# Altium PCB 701C USB Hub.PcbDoc (part 3 of 3)
Units mil, origin at the board's own origin, x right, y up, seen from the top; angles counter-clockwise.
Board outline 4055.12 x 2244.09 mil, 4 copper layers (Component Side, Ground Plane, Power Plane, Solder Side), stack 61 mil thick; 153 components, 125 nets, 650 pads, 236 vias.
Unrouted connection lines stored in the file: 211.
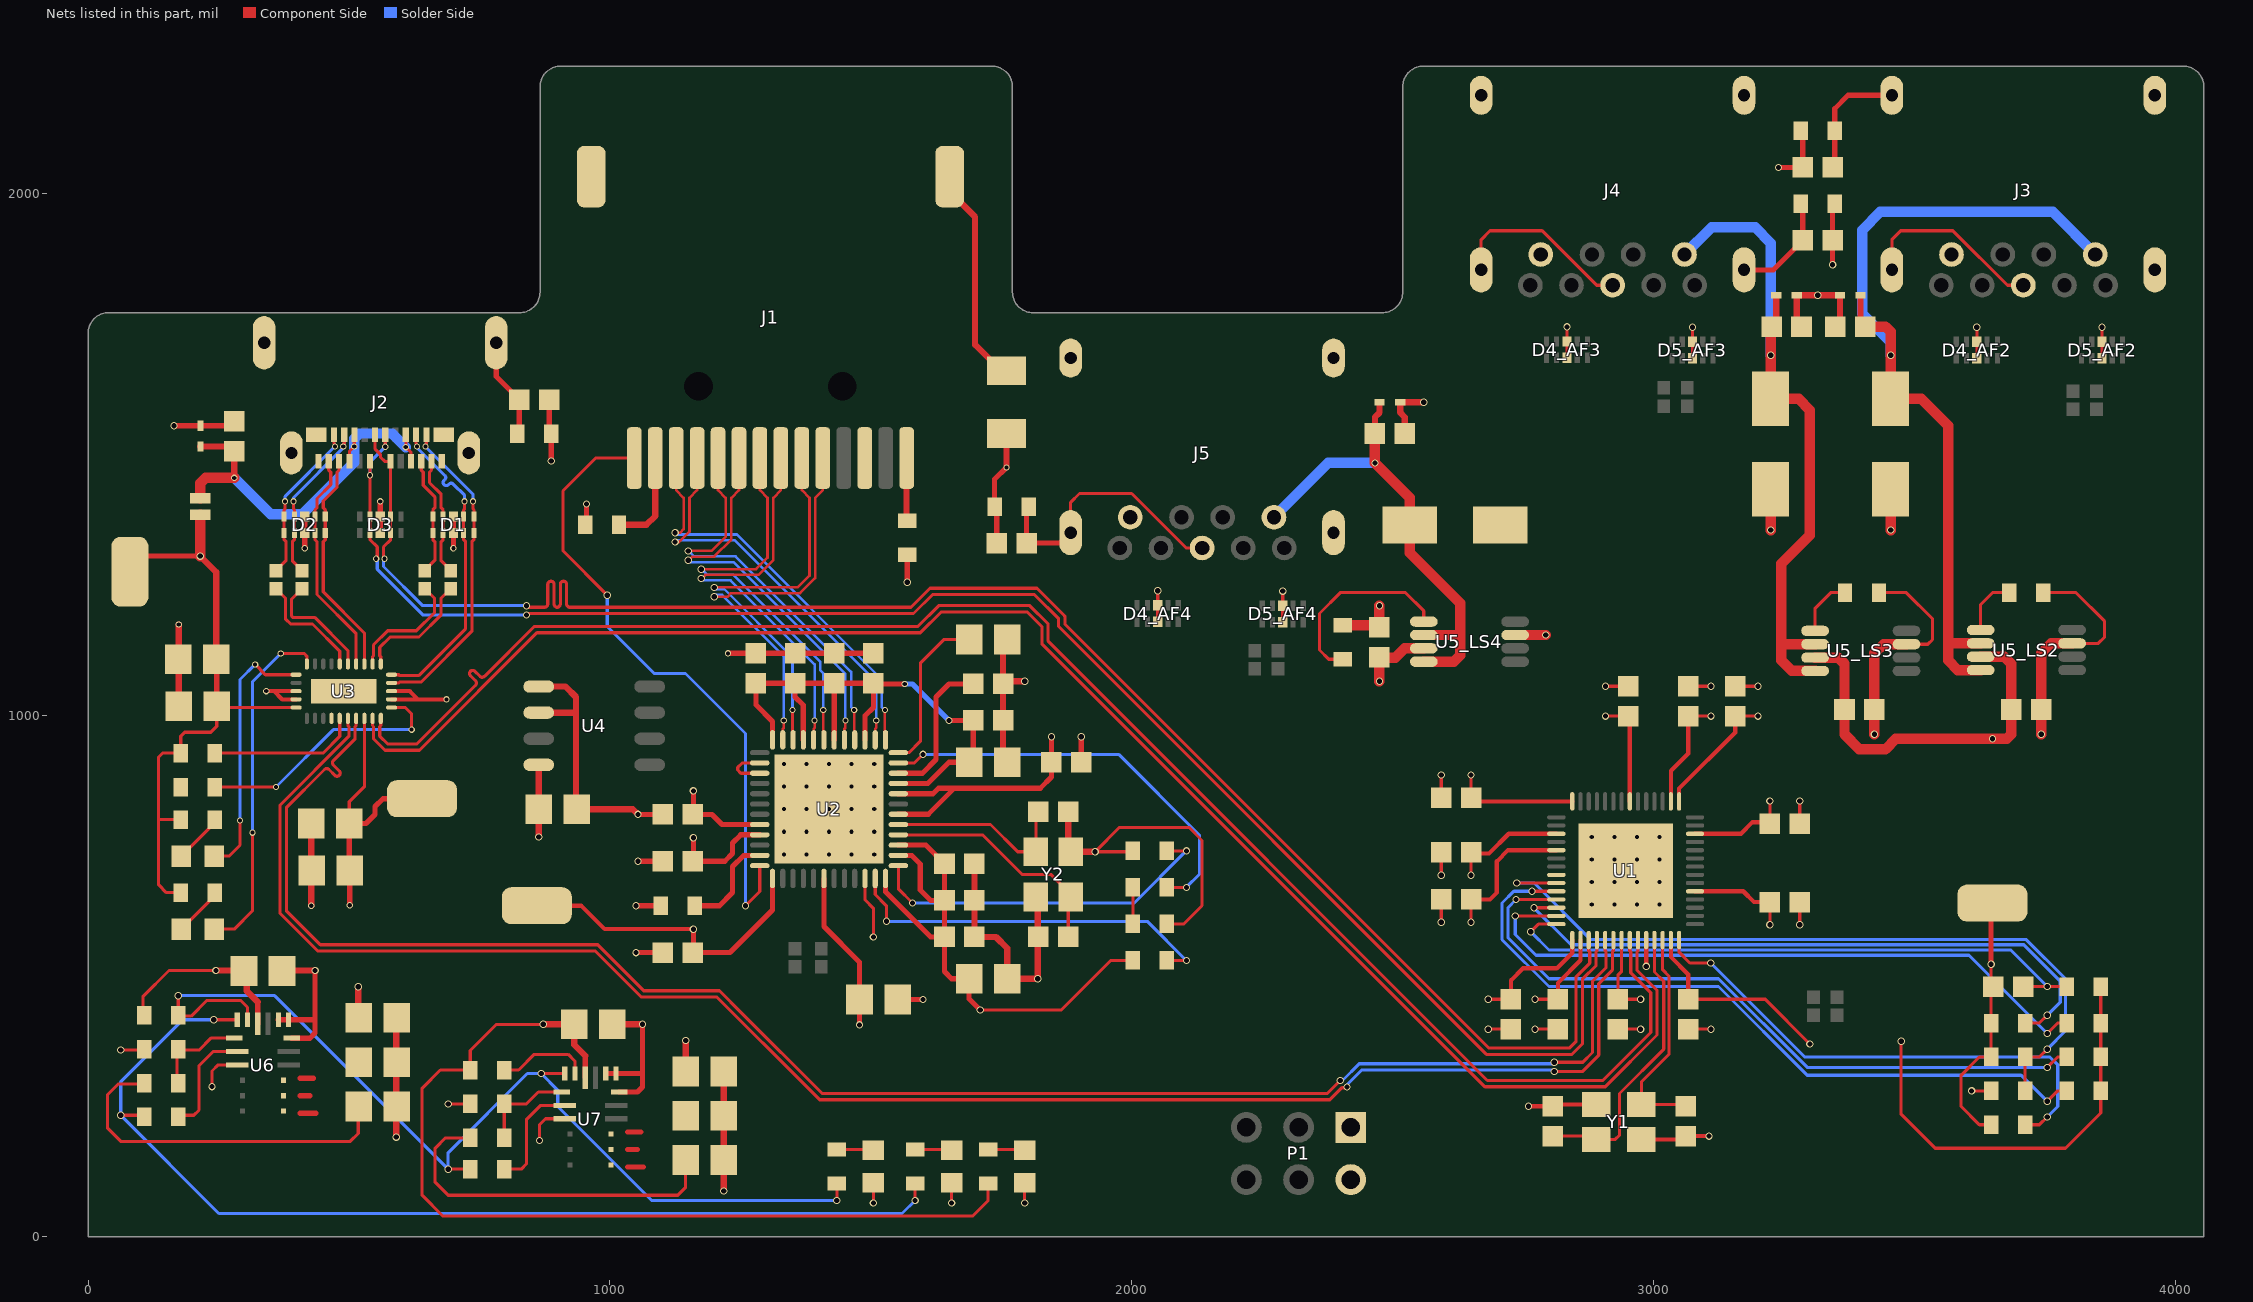
[diagram p4: the nets of this part, all layers, seen from the top]

## Via types
v1: diameter 14, hole 10, Component Side to Solder Side, 149 vias
v2: diameter 12, hole 8, Component Side to Solder Side, 46 vias
v3: diameter 19.68, hole 7.87, Component Side to Solder Side, 41 vias

## Nets (pads, with @x,y where several pads share a name; then routed paths per layer and width w, separated by ;. In a path a pad name is that pad's centre, name@x,y a point inside that pad or via, vN(x,y) a via of type N, cw(c..) or ccw(c..) an arc to the next point about the centre after c; other vN are vias at no path point) (continued)
GND: C1.2 C2.1 C3.1 C4.2 C5.2 C6.2 C7.2 C8.2 C9.2 C10.2 C11.2 C14.2 C15.2 C16.2 C17.2 C20.2 C21.2 C22.2 C23.2 C34.2 C35.2 C36_LS2.2 C36_LS3.2 C36_LS4.2 C37.2 C38.2 C39.2 C40.2 C41.2 C42.2 C43.2 C44.2 C45.2 C46.2 C47.2 C48.2 C49.2 C50.2 C51.2 C52.2 C53.2 C54.2 C57_AF2.2 C57_AF3.2 C57_AF4.2 C58.2 C59.2 C60.2 C61.2 C62.2 C63.2 C64.2 C65.2 C66.2 C67_AF2.2 C67_AF3.2 C67_AF4.2 C68.2 C71.2 C72.2 C73.2 C74.2 D1.GND D2.GND D3.GND D4_AF2.GND D4_AF3.GND D4_AF4.GND D5_AF2.GND D5_AF3.GND D5_AF4.GND D6_AF2.2 D6_AF3.2 D6_AF4.2 D7.2 D8.2 D9.2 D10.2 J1.12 J2.A1 J2.A12 J2.B1 J2.B12 J3.4 J4.4 J5.4 J9.1 P1.2 R4.1 R6.1 R7.1 R13_LS2.1 R13_LS3.1 R13_LS4.1 R16.2 R17.1 R19_AF2.1 R19_AF3.1 R19_AF4.1 R20.1 R22.1 R24.1 R25.1 R26.1 U1.52 U1.57 U2.34 U2.PAD U3.4 U3.12 U3.13 U3.28 U3.29 U3.31 U4.5 U4.6 U5_LS2.3 U5_LS3.3 U5_LS4.3 U6.3 U6.12 U6.13 U6.14 U7.3 U7.12 U7.13 U7.14 Y1.GND Y2.GND | length 8827.4
  Component Side w6: v1(62.36,358.19) R22.1@104.8,358.19 ; v1(237.36,288.19) 237.36,318.19 249.02,329.84 U6.3@285.79,329.84 ; v1(690,255) R24.1@732.44,255 ; v1(865,185) 865,215 876.65,226.65 U7.3@913.42,226.65 ; U2.34@1488.9,687.13 1488.9,646.1 1505,630 v1(1505,575) ; v1(1505,65) D10.2@1505,103.5 ; v1(1655,65) D9.2@1655,103.5 ; v1(1795,65) D8.2@1795,103.5 ; R17.1@2002.44,740 2000.75,738.31 v1(1930,738.31) 1976.69,785 2110,785 2135,760 2135,635 2100,600 R16.2@2067.56,600 ; D4_AF4.GND@2050,1179.25 D4_AF4.GND@2050,1210.75 v1(2050,1238.62) ; D5_AF4.GND@2289.68,1178.5 D5_AF4.GND@2289.68,1210 v1(2289.68,1237.87) ; v1(2593.35,603.35) C7.2@2593.35,646.97 ; v1(2593.35,693.35) C16.2@2593.35,736.97 ; C4.2@2593.35,841.97 v1(2593.35,885.59) ; v1(2683.35,398.35) C6.2@2726.97,398.35 ; v1(2773.35,398.35) C15.2@2816.97,398.35 ; D4_AF3.GND@2834.37,1685 D4_AF3.GND@2834.37,1716.5 v1(2834.37,1744.37) ; v1(2908.35,1055.59) C5.2@2951.97,1055.59 ; C8.2@2931.97,398.35 v1(2975.59,398.35) ; C17.2@3066.97,398.35 v1(3110.59,398.35) ; C14.2@3066.97,1055.59 v1(3110.59,1055.59) ; D5_AF3.GND@3075,1684.25 D5_AF3.GND@3075,1715.75 v1(3075,1743.62) ; C11.2@3156.97,1055.59 v1(3200.59,1055.59) ; v1(3280.59,598.35) C9.2@3280.59,641.97 ; C10.2@3280.59,791.97 v1(3280.59,835.59) ; R13_LS3.1@3432.56,1235 3485,1235 3535,1185 3535,1145 3526.18,1136.18 U5_LS3.3@3485.2,1136.18 ; D4_AF2.GND@3620,1684.25 D4_AF2.GND@3620,1715.75 v1(3620,1743.62) ; R6.1@3647.44,215 3625,215 3590,250 3590,310 3625,345 R7.1@3647.44,345 R4.1@3647.44,410 v1(3647.44,522.56) ; R13_LS2.1@3747.56,1235 3810,1235 3865,1180 3865,1150 3852.8,1137.8 U5_LS2.3@3802.6,1137.8 ; D5_AF2.GND@3860,1684.25 D5_AF2.GND@3860,1715.75 v1(3860,1743.62)
  Component Side w8: U3.29@398.46,1030.47 371.97,1030.47 356.22,1046.22 v2(341.22,1046.22) U3.28@398.46,1046.22 ; U3.12@581.54,1030.47 v2(686.97,1030.47) 631.97,1030.47 616.22,1046.22 U3.13@581.54,1046.22 ; v1(2760.59,250.59) C3.1@2806.97,250.59 2810.28,253.9 Y1.GND@2890.35,253.9 ; Y1.GND@2976.97,186.97 3055.59,186.97 C2.1@3061.97,193.35 v1(3106.65,193.35) ; v1(2986.34,518.66) U1.52@2986.34,569.09
  Component Side w10: v1(164.69,1554.69) D7.2@215,1554.69 271.06,1554.69 C68.2@280,1563.62 ; U6.14@364.53,416.46 U6.13@384.21,416.46 433.23,416.46 434.96,418.19 ; U6.12@390.12,381.02 425.2,381.02 434.96,390.79 434.96,418.19 ; v2(415,1320) D2.GND@415,1349.25 D2.GND@415,1380.75 ; v1(434.96,510.79) 434.96,418.19 ; D3.GND@560,1349.25 D3.GND@560,1380.75 v2(560,1410) ; v2(700,1320) D1.GND@700,1349.25 D1.GND@700,1380.75 ; C58.2@883.62,1605 883.62,1543.94 R20.1@887.56,1540 v1(887.56,1487.44) ; R26.1@952.44,1365 955,1367.56 v1(955,1405) ; U7.14@992.16,313.27 U7.13@1011.85,313.27 1060.87,313.27 1062.6,315 ; U7.12@1017.76,277.83 1052.83,277.83 1062.6,287.6 1062.6,315 ; v1(1050,545) C39.2@1101.38,545 ; v1(1053.94,720) C38.2@1101.38,720 ; v1(1053.94,810) C49.2@1101.38,810 ; v1(1062.6,407.6) 1062.6,315 ; v2(1226.38,1118.62) C42.2@1280,1118.62 C43.2@1355,1118.62 C44.2@1430,1118.62 C45.2@1505,1118.62 ; C41.2@1551.5,455 v1(1600,455) ; v1(1570,1255) R25.1@1570,1307.44 ; C57_AF4.2@1741.38,1330 1741.38,1396.06 R19_AF4.1@1737.44,1400 1737.44,1452.44 v2(1760,1475) ; C40.2@1903.62,910 v1(1903.62,958.62) ; v1(3240,2050) C57_AF2.2@3286.38,2050 3286.38,2116.06 R19_AF2.1@3282.44,2120 ; v1(3343.62,1863.62) C57_AF3.2@3343.62,1910 3343.62,1976.06 R19_AF3.1@3347.56,1980 ; v1(3647.44,522.56) 3647.44,637.44 J9.1@3650,640
  Component Side w12: C21.2@173.5,1017.44 v2(173.5,1173.94) ; C59.2@377.13,510.79 v1(434.96,510.79) ; v2(427.52,634.96) C23.2@427.52,792.44 ; v1(590.59,191.42) C60.2@590.59,420.59 ; U4.6@863.7,1005 935,1005 ; U4.5@863.7,1055 915,1055 935,1035 935,1005 ; C63.2@1004.76,407.6 v1(1062.6,407.6) ; v1(1053.94,810) 1043.94,820 C54.2@936.5,820 935,821.5 935,1005 ; v1(1218.23,88.23) C66.2@1218.23,147.4 C65.2@1218.23,232.4 C64.2@1218.23,317.4 ; C50.2@1698.62,715 C51.2@1698.62,645 C52.2@1698.62,575 1740,575 1761.5,553.5 C53.2@1761.5,495 v1(1820,495) 1820,648.23 Y2.GND@1816.54,651.69 ; v2(1760,1475) C71.2@1760,1539.88 ; C48.2@1761.5,910 1753.62,917.87 C47.2@1753.62,990 C46.2@1753.62,1060 ; C37.2@1761.5,1145 1753.62,1137.13 C46.2@1753.62,1060 ; v1(1795,1065) 1761.61,1065 1755.12,1058.5 C46.2@1753.62,1060 ; C35.2@1878.62,815 1878.62,743.15 Y2.GND@1883.46,738.31 v1(1930,738.31) ; C67_AF4.2@2523.62,1540 2523.62,1571.38 2514.69,1580.31 D6_AF4.2@2514.69,1600 v1(2560,1600) ; C67_AF3.2@3283.94,1745 3275,1753.94 D6_AF3.2@3275,1805 v1(3315,1805) D6_AF2.2@3357.76,1805 3357.76,1753.94 C67_AF2.2@3348.82,1745
  Component Side w20: R13_LS4.1@2405,1172.56 2471.06,1172.56 C36_LS4.2@2475,1168.62 v1(2475,1210) ; U5_LS4.3@2735.16,1153.8 v1(2793.8,1153.8) ; v1(3225,1355) C73.2@3225,1433.39 ; v1(3423.62,963.62) C36_LS3.2@3423.62,1011 3423.62,1118.62 3441.18,1136.18 U5_LS3.3@3485.2,1136.18 ; v1(3455,1355) C72.2@3455,1433.39 ; v1(3743.62,963.62) C36_LS2.2@3743.62,1011 3743.62,1118.62 3762.8,1137.8 U5_LS2.3@3802.6,1137.8
  other v3: 2882.01,637.01 2925.31,637.01 2968.62,637.01 3011.93,637.01 2882.01,680.32 2925.31,680.32 2968.62,680.32 3011.93,680.32 2882.01,723.62 2925.31,723.62 2968.62,723.62 3011.93,723.62 1333.39,733.39 1376.69,733.39 1420,733.39 1463.31,733.39 1506.61,733.39 2882.01,766.93 2925.31,766.93 2968.62,766.93 3011.93,766.93 1333.39,776.69 1376.69,776.69 1420,776.69 1463.31,776.69 1506.61,776.69 1333.39,820 1376.69,820 1420,820 1463.31,820 1506.61,820 1333.39,863.31 1376.69,863.31 1420,863.31 1463.31,863.31 1506.61,863.31 1333.39,906.61 1376.69,906.61 1420,906.61 1463.31,906.61 1506.61,906.61
"LINK LED2": J1.1 U2.24 | length 1269.5
  Component Side w6: v1(995,1230) 910,1315 910,1430 972.96,1492.96 J1.1@1046.65,1492.96 1045,1491.3 J1.1@1045,1450 ; v1(1260,635) 1287.13,662.13 U2.24@1287.13,711.73
  Solder Side w6: v1(995,1230) 995,1170 1085,1080 1145,1080 1260,965 v1(1260,635)
"MUX SHD": C58.1 J2.SHD R20.2 | length 193.8
  Component Side w10: J2.SHD@782.09,1713.82 782.09,1649.29 C58.1@826.38,1605 826.38,1543.94 R20.2@822.44,1540
MUX_RX_N: U1.51 U3.9 | length 3254.7
  Component Side w6: U3.9@545.12,994.06 545.12,980.23 546.99,978.35 546.99,955.03 569.02,933 634.97,933 859.97,1158 1594.97,1158 1634.97,1198 1800.03,1198 1828,1170.03 1828,1137 2677,288 2908,288 3007,387 3007,473 2968.72,511.28 2968.72,546.5 2970.59,548.38 U1.51@2970.59,569.09
MUX_RX_P: U1.50 U3.10 | length 3256.3
  Component Side w6: U3.10@560.87,994.06 560.87,980.23 558.99,978.35 558.99,960 573.99,945 630,945 742.5,1057.5 ccw(c738.26,1061.74) 742.5,1065.99 732.73,1075.76 cw(c736.97,1080) 732.73,1084.24 cw(c736.97,1080) 741.21,1084.24 750.99,1074.47 ccw(c755.23,1078.71) 759.47,1074.47 760,1075 855,1170 1590,1170 1630,1210 1805,1210 1840,1175 1840,1141.97 2681.97,300 2903.03,300 2995,391.97 2995,468.03 2956.72,506.31 2956.72,546.5 2954.84,548.38 U1.50@2954.84,569.09
MUX_TX_N: U1.48 U3.6 | length 3377.3
  Component Side w6: U3.6@497.87,994.06 497.87,980.23 499.75,978.35 499.75,959.75 368,828 368,620.03 440.03,548 972,548 1060,460 1205,460 1379,286 1402,263 2379.97,263 2402.97,286 2411.46,286 v1(2412.73,287.27) ; v1(2810,317) 2863.97,317 2895.45,348.48 2895.45,485.45 2921.47,511.47 2921.47,546.5 2923.35,548.38 U1.48@2923.35,569.09
  Solder Side w6: v1(2412.73,287.27) 2412.73,291.51 2441.21,320 2807,320 v1(2810,317)
MUX_TX_P: U1.47 U3.7 | length 3378.1
  Component Side w6: U3.7@513.62,994.06 513.62,980.23 511.75,978.35 511.75,954.78 470,913.03 ccw(c474.24,908.79) 470,904.54 481.29,893.26 cw(c477.04,889.02) 481.29,884.77 cw(c477.04,889.02) 472.8,884.77 461.51,896.06 ccw(c457.27,891.82) 453.03,896.06 450.99,894.01 380,823.03 380,625 445,560 976.97,560 1064.97,472 1209.97,472 1251.97,430 1406.97,275 2375,275 v1(2400,300) ; v1(2810,335) 2865,335 2883.45,353.45 2883.45,490.42 2909.47,516.44 2909.47,546.5 2907.6,548.38 U1.47@2907.6,569.09
  Solder Side w6: v1(2400,300) 2404.24,300 2436.24,332 2807,332 v1(2810,335)
NetC1_1: C1.1 R8.1 U1.42 | length 1172.5
  Component Side w6: v1(2765,585) 2779.61,599.61 U1.42@2814.09,599.61 ; C1.1@3708.62,480 v1(3755,480) R8.1@3792.44,480
  Solder Side w6: v1(2765,585) 2800,550 3685,550 v1(3755,480)
NetC2_2: C2.2 U1.54 Y1.1 | length 428.6
  Component Side w6: U1.54@3017.83,569.09 3017.83,512.17 3030,500 3030,350 2976.97,296.97 Y1.1@2976.97,253.9 3058.66,253.9 C2.2@3061.97,250.59
NetC3_2: C3.2 U1.53 Y1.3 | length 550.7
  Component Side w6: C3.2@2806.97,193.35 2883.98,193.35 Y1.3@2890.35,186.97 2926.97,186.97 2935,195 2935,275 3020,360 3020,490 3002.09,507.91 U1.53@3002.09,569.09
NetC34_1: C34.1 U2.40 Y2.1 | length 461.5
  Component Side w6: U2.40@1552.87,770.79 1714.21,770.79 1790,695 1845,695 1883.46,656.54 Y2.1@1883.46,651.69 1878.62,646.85 C34.1@1878.62,575
NetC35_1: C35.1 U2.41 Y2.3 | length 364
  Component Side w6: U2.41@1552.87,790.47 1729.53,790.47 1781.69,738.31 Y2.3@1816.54,738.31 1816.54,810.16 C35.1@1821.38,815
NetC37_1: C37.1 U2.48 | length 313.3
  Component Side w6: U2.48@1552.87,928.27 1573.27,928.27 1595,950 1595,1100 1640,1145 C37.1@1688.5,1145
NetC57_AF2_1: C57_AF2.1 J3.7 J3.SHD R19_AF2.2 | length 594.8
  Component Side w6: J3.SHD@3457.28,1853.59 3457.28,1911.62 3474.21,1928.55 3574.21,1928.55 3678.71,1824.06 J3.7@3709.25,1824.06
  Component Side w10: C57_AF2.1@3343.62,2050 3347.56,2053.94 R19_AF2.2@3347.56,2120 3347.56,2162.56 3373.23,2188.23 J3.SHD@3457.28,2188.23
NetC57_AF3_1: C57_AF3.1 J4.7 J4.SHD R19_AF3.2 | length 567.9
  Component Side w6: J4.SHD@2669.88,1853.59 2669.88,1911.62 2686.81,1928.55 2786.81,1928.55 2891.3,1824.06 J4.7@2921.85,1824.06
  Component Side w10: J4.SHD@3173.82,1853.59 3229.96,1853.59 C57_AF3.1@3286.38,1910 3286.38,1976.06 R19_AF3.2@3282.44,1980
NetC57_AF4_1: C57_AF4.1 J5.7 J5.SHD R19_AF4.2 | length 524.7
  Component Side w6: J5.SHD@1883.07,1350.04 1883.07,1408.07 1900,1425 2000,1425 2104.49,1320.51 J5.7@2135.04,1320.51
  Component Side w10: R19_AF4.2@1802.56,1400 1798.62,1396.06 C57_AF4.1@1798.62,1330 1863.03,1330 J5.SHD@1883.07,1350.04
NetC71_1: C71.1 J1.SHD | length 423.2
  Component Side w12: J1.SHD@1651.18,2032.33 1651.18,2003.82 1700,1955 1700,1710 1749.88,1660.12 C71.1@1760,1660.12
NetD8_1: D8.1 R31.2 | length 70.4
  Component Side w6: R31.2@1725,167.56 1793.94,167.56 D8.1@1795,166.5
NetD9_1: D9.1 R32.2 | length 70.4
  Component Side w6: R32.2@1585,167.56 1653.94,167.56 D9.1@1655,166.5
NetD10_1: D10.1 R33.2 | length 70.4
  Component Side w6: R33.2@1435,167.56 1503.94,167.56 D10.1@1505,166.5
NetD11_1: D11.1 R34.2 | length 96.5
  Component Side w6: D11.1@178.5,590 242.56,654.06 R34.2@242.56,660
NetD11_2: D11.2 U3.25 | length 670.7
  Component Side w6: D11.2@241.5,590 280,590 315,625 v2(315,775) ; v2(369.13,1118.31) 414.13,1118.31 419.13,1113.31 U3.25@419.13,1098.39
  Solder Side w6: v2(315,775) 315,1064.17 v2(369.13,1118.31)
NetD12_1: D12.1 R35.2 | length 96.5
  Component Side w6: D12.1@178.5,730 242.56,794.06 R35.2@242.56,800
NetD12_2: D12.2 U3.26 | length 503.3
  Component Side w6: D12.2@241.5,730 270,730 290.98,750.98 v2(290.98,798.43) ; v2(320,1097.44) 339.72,1077.72 U3.26@398.46,1077.72
  Solder Side w6: v2(290.98,798.43) 290.98,1068.43 v2(320,1097.44)
NetJ1_2: J1.2 R26.2 | length 187.4
  Component Side w12: R26.2@1017.56,1365 1070,1365 1086.81,1381.81 J1.2@1086.81,1492.96
NetJ1_14: J1.14 R25.2 | length 120.9
  Component Side w12: J1.14@1568.7,1492.96 1568.7,1373.86 R25.2@1570,1372.56
NetR1_2: R1.2 U1.39 | length 1339.2
  Component Side w6: v1(2736.85,646.85) U1.39@2814.09,646.85 ; v1(3755,325) 3775,345 R1.2@3792.44,345
  Solder Side w6: v1(2736.85,646.85) 2721.35,631.35 2721.35,573.65 2800,495 3125,495 3295,325 v1(3755,325)
NetR2_2: R2.2 U1.38 | length 1402.6
  Component Side w6: v1(2767.6,662.6) U1.38@2814.09,662.6 ; v1(3755,260) 3775,280 R2.2@3792.44,280
  Solder Side w6: v1(2767.6,662.6) 2732.6,662.6 2710,640 2710,570 2800,480 3125,480 3295,310 3705,310 v1(3755,260)
NetR3_2: R3.2 U1.41 | length 1258.4
  Component Side w6: v1(2735.35,615.35) U1.41@2814.09,615.35 ; v1(3755,390) 3775,410 R3.2@3792.44,410
  Solder Side w6: v1(2735.35,615.35) 2735.35,579.65 2775,540 3605,540 v1(3755,390)
NetR4_2: R4.2 U1.40 | length 1234.3
  Component Side w6: v1(2771.1,631.1) U1.40@2814.09,631.1 ; R4.2@3712.56,410 3740,410 v1(3755,425)
  Solder Side w6: v1(2771.1,631.1) 2842.2,560 3710,560 3780,490 3780,450 v1(3755,425)
NetR5_1: R5.1 R7.2 U1.37 | length 1466.5
  Component Side w6: v1(2738.35,678.35) U1.37@2814.09,678.35 ; R5.1@3712.56,280 R7.2@3712.56,345 3740,345 v1(3755,360)
  Solder Side w6: v1(2738.35,678.35) 2771.65,678.35 2880,570 3715,570 3790,495 3790,395 v1(3755,360)
NetR6_2: R6.2 U1.56 | length 995.4
  Component Side w6: U1.56@3049.33,569.09 3049.33,545.67 3070,525 v1(3110,525) ; R6.2@3712.56,215 3740,215 v1(3755,230)
  Solder Side w6: v1(3110,525) 3290,345 3760,345 3775,330 3775,250 v1(3755,230)
NetR11_1: R11.1 U3.11 | length 496.6
  Component Side w6: R11.1@242.56,862.44 v2(360,862.44) ; U3.11@581.54,1014.72 607.72,1014.72 620,1002.44 v2(620,972.44)
  Solder Side w6: v2(360,862.44) 470,972.44 v2(620,972.44)
NetR12_1: R12.1 U3.5 | length 287.4
  Component Side w6: R12.1@242.56,927.44 450,927.44 482.13,959.57 U3.5@482.13,994.06
NetR13_LS2_2: R13_LS2.2 U5_LS2.5 | length 113.4
  Component Side w6: U5_LS2.5@3627.4,1163.39 3627.4,1212.4 3650,1235 R13_LS2.2@3682.44,1235
NetR13_LS3_2: R13_LS3.2 U5_LS3.5 | length 113.1
  Component Side w6: U5_LS3.5@3310,1161.77 3310,1205 3340,1235 R13_LS3.2@3367.44,1235
NetR13_LS4_2: R13_LS4.2 U5_LS4.5 | length 373.9
  Component Side w6: R13_LS4.2@2405,1107.44 2377.56,1107.44 2360,1125 2360,1195 2400,1235 2525,1235 2559.96,1200.04 U5_LS4.5@2559.96,1179.39
NetR14_1: R14.1 U2.35 | length 734.5
  Component Side w6: U2.35@1508.58,687.13 1508.58,656.42 1530,635 v1(1530,605) ; R14.1@2067.56,530 v1(2105,530)
  Solder Side w6: v1(1530,605) 2030,605 v1(2105,530)
NetR15_1: R15.1 U2.47 | length 795.9
  Component Side w6: U2.47@1552.87,908.58 1583.58,908.58 v1(1600,925) ; R15.1@2067.56,670 v1(2105,670)
  Solder Side w6: v1(1600,925) 1975,925 2130,770 2130,695 v1(2105,670)
NetR15_2: R15.2 R16.1 | length 70
  Component Side w6: R16.1@2002.44,600 R15.2@2002.44,670
NetR17_2: R17.2 U2.37 | length 686.8
  Component Side w6: U2.37@1552.87,711.73 1552.87,667.13 v1(1580,640) ; R17.2@2067.56,740 v1(2105,740)
  Solder Side w6: v1(1580,640) 2005,640 v1(2105,740)
NetR18_1: R18.1 U2.23 | length 193.8
  Component Side w10: R18.1@1162.56,635 1210,635 1235,660 1235,710 1256.42,731.42 U2.23@1287.13,731.42
NetR21_1: R21.1 R22.2 U6.1 | length 184.4
  Component Side w6: R21.1@169.92,293.19 169.92,358.19 212.36,358.19 235.2,381.02 U6.1@279.88,381.02
NetR23_1: R23.1 R24.2 U7.1 | length 184.4
  Component Side w6: R23.1@797.56,190 R24.2@797.56,255 840,255 862.83,277.83 U7.1@907.52,277.83
NetR27_2: R27.2 R30.2 R33.1 U6.17 U7.18 | length 1948.4
  Component Side w6: R27.2@169.92,423.19 197.36,423.19 227.36,453.19 292.36,453.19 305.47,440.08 U6.17@305.47,416.46 ; R27.2@172.56,425 v1(172.56,462.56) ; v1(690,130) R30.2@732.44,130 ; v1(868.27,313.27) U7.18@913.42,313.27 ; v1(1435,70) R33.1@1435,102.44
  Solder Side w6: v1(172.56,462.56) 357.44,462.56 v1(690,130) 690,161.54 841.73,313.27 v1(868.27,313.27) 900,281.54 900,250 1080,70 v1(1435,70)
NetR28_1: R28.1 U6.2 | length 216.3
  Component Side w6: R28.1@169.92,233.19 202.36,233.19 212.36,243.19 212.36,328.19 239.61,355.43 U6.2@285.79,355.43
NetR28_2: R28.2 R32.1 U6.18 | length 2022.8
  Component Side w6: v1(62.36,233.19) R28.2@104.8,233.19 ; v1(240.63,416.46) U6.18@285.79,416.46 ; v1(1585,70) R32.1@1585,102.44
  Solder Side w6: v1(240.63,416.46) 181.46,416.46 62.36,297.36 v1(62.36,233.19) 250.55,45 1560,45 v1(1585,70)
NetR29_2: R29.2 U7.17 | length 177
  Component Side w6: R29.2@797.56,320 825,320 855,350 920,350 933.11,336.89 U7.17@933.11,313.27
NetR30_1: R30.1 U7.2 | length 216.3
  Component Side w6: R30.1@797.56,130 830,130 840,140 840,225 867.24,252.24 U7.2@913.42,252.24
NetU1_36: U1.36
TR0_N: J1.4 U2.2 | length 796.6
  Component Side w5: v1(1125,1332) 1132.56,1332 1152.55,1351.99 1152.55,1416.82 1167.13,1431.4 J1.4@1167.13,1492.96 ; U2.2@1508.58,952.87 1508.58,974.07 1510.43,975.92 v2(1510.43,990) v2@1512.93,990
  Solder Side w5: v1(1125,1332) 1128.5,1335.5 1238.94,1335.5 1510,1064.44 1510,1011.61 1510.43,1011.18 v2(1510.43,990)
TR0_P: J1.3 U2.1 | length 793.2
  Component Side w5: v1(1125,1350) 1135,1350 1141.55,1356.55 1141.55,1416.82 1126.97,1431.4 J1.3@1126.97,1492.96 ; v2(1527.17,1010) 1527.17,953.98 U2.1@1528.27,952.87
  Solder Side w5: v1(1125,1350) 1128.5,1346.5 1243.5,1346.5 1521,1069 1521,1016.17 v2(1527.17,1010)
TR1_N: J1.6 U2.5 | length 782.1
  Component Side w5: v1(1150,1297) 1151.09,1297 1158.09,1304 1199.56,1304 1232.86,1337.3 1232.86,1416.82 1247.44,1431.4 J1.6@1247.44,1492.96 ; U2.5@1449.53,952.87 1449.53,974.07 1451.37,975.92 v2(1451.37,990) v2@1453.87,990
  Solder Side w5: v1(1150,1297) 1153.5,1293.5 1236.5,1293.5 1451.37,1078.63 v2(1451.37,990)
TR1_P: J1.5 U2.4 | length 781.7
  Component Side w5: v1(1150,1315) 1195,1315 1221.86,1341.86 1221.86,1416.82 1207.28,1431.4 J1.5@1207.28,1492.96 ; v2(1468.11,1010) 1468.11,953.98 U2.4@1469.21,952.87
  Solder Side w5: v1(1150,1315) 1154.5,1310.5 1155.59,1310.5 1161.59,1304.5 1241.06,1304.5 1462.37,1083.19 1462.37,1015.74 v2(1468.11,1010)
TR2_N: J1.8 U2.8 | length 787.8
  Component Side w5: v1(1175,1262) 1176.09,1262 1183.09,1269 1284.56,1269 1313.18,1297.62 1313.18,1416.82 1327.75,1431.4 J1.8@1327.75,1492.96 ; U2.8@1390.47,952.87 1390.47,974.07 1392.31,975.92 v2(1392.31,990) v2@1394.81,990
  Solder Side w5: v1(1175,1262) 1178.5,1258.5 1231.5,1258.5 1392.31,1097.69 v2(1392.31,990)
TR2_P: J1.7 U2.7 | length 787.3
  Component Side w5: v1(1175,1280) 1280,1280 1302.18,1302.18 1302.18,1416.82 1287.6,1431.4 J1.7@1287.6,1492.96 ; v2(1409.06,1010) 1409.06,953.98 U2.7@1410.16,952.87
  Solder Side w5: v1(1175,1280) 1179.5,1275.5 1180.59,1275.5 1186.59,1269.5 1236.06,1269.5 1403.31,1102.24 1403.31,1086.03 1409.06,1080.29 v2(1409.06,1010)
TR3_N: J1.10 U2.11 | length 790.8
  Component Side w5: v1(1200,1227) 1225.49,1227 1232.49,1234 1364.56,1234 1393.49,1262.93 1393.49,1416.82 1408.07,1431.4 J1.10@1408.07,1492.96 ; U2.11@1331.42,952.87 1331.42,974.07 1333.26,975.92 v2(1333.26,990) v2@1335.76,990
  Solder Side w5: v1(1200,1227) 1203.5,1230.5 1215,1230.5 1333.26,1112.24 v2(1333.26,990)
TR3_P: J1.9 U2.10 | length 787.4
  Component Side w5: v1(1200,1245) 1360,1245 1382.49,1267.49 1382.49,1416.82 1367.91,1431.4 J1.9@1367.91,1492.96 ; v2(1350,1010) 1350,953.98 U2.10@1351.1,952.87
  Solder Side w5: v1(1200,1245) 1203.5,1241.5 1219.56,1241.5 1344.26,1116.8 1344.26,1112.24 1350,1106.5 v2(1350,1010)
UFP_D_N: D3.2 J2.A7 J2.B7 U1.46 | length 3259.9
  Component Side w6: J2.A7@539.96,1486.66 v2(539.96,1459.96) 540.32,1459.6 D3.2@540.32,1380.75 D3.2@540.32,1349.25 540.32,1336.41 554,1322.72 554,1302 v2(552,1300) ; v2(569.49,1514.49) J2.B7@569.49,1537.84 ; v1(840,1192) 843,1195 1581.97,1195 1618.49,1231.51 1813.49,1231.51 1860,1185 1860,1170 2680,350 2843.97,350 2863.97,370 2863.97,493.97 2889.98,519.98 2889.98,546.5 2891.85,548.38 U1.46@2891.85,569.09
  Solder Side w6: v2(539.96,1459.96) 539.96,1484.96 v2(569.49,1514.49) ; v2(552,1300) 554,1298 554,1280.03 642.03,1192 v1(840,1192)
UFP_D_P: D3.4 J2.A6 J2.B6 U1.45 | length 3376.7
  Component Side w6: J2.B6@549.8,1537.84 550,1537.64 550,1510 560,1500 560,1495 568.34,1486.66 J2.A6@579.33,1486.66 579.33,1469.88 579.68,1469.52 D3.4@579.68,1380.75 D3.4@579.68,1349.25 579.68,1336.41 566,1322.72 566,1302 v2(568,1300) ; v1(840,1210) 843,1207 875,1207 ccw(c875,1213) 881,1213 881,1251 cw(c887,1251) 887,1257 cw(c887,1251) 893,1251 893,1213 ccw(c899,1213) 899,1207 ccw(c899,1213) 905,1213 905,1251 cw(c911,1251) 911,1257 cw(c911,1251) 917,1251 917,1213 ccw(c923,1213) 923,1207 929,1207 930,1207 1577,1207 1610,1240 1613.51,1243.51 1818.46,1243.51 1821.97,1240 1868.49,1193.49 1872,1189.97 1872,1174.97 2684.97,362 2839,362 2851.97,374.97 2851.97,498.94 2877.98,524.95 2877.98,546.5 2876.1,548.38 U1.45@2876.1,569.09
  Solder Side w6: v2(568,1300) 566,1298 566,1285 641,1210 v1(840,1210)
UFP_RX1_N: D1.4 J2.B10 U3.15 | length 609.7
  Component Side w6: U3.15@581.54,1077.72 595.36,1077.72 597.24,1075.84 633.4,1075.84 723.53,1165.97 723.53,1332.57 719.68,1336.41 D1.4@719.68,1349.25 D1.4@719.68,1380.75 719.68,1393.59 721.53,1395.43 v2(721.53,1410) ; J2.B10@628.54,1537.84 628.54,1521.06 630.38,1519.22 v2(630.38,1515)
  Solder Side w6: v2(630.38,1515) 630.38,1512.62 684,1459 cw(c680.73,1455.73) 684,1452.46 682.14,1450.59 ccw(c686.38,1446.35) 682.14,1442.11 ccw(c686.38,1446.35) 690.62,1442.11 691.51,1443 cw(c695.76,1438.76) 700,1443 721.53,1421.47 v2(721.53,1410)
UFP_RX1_P: D1.5 J2.B11 U3.14 | length 612.7
  Component Side w6: U3.14@581.54,1061.97 595.36,1061.97 597.24,1063.84 638.37,1063.84 735.53,1161 735.53,1332.57 739.37,1336.41 D1.5@739.37,1349.25 D1.5@739.37,1380.75 739.37,1393.59 737.53,1395.43 v2(737.53,1410) ; v2(646.38,1515) 646.38,1519.22 648.23,1521.06 J2.B11@648.23,1537.84
  Solder Side w6: v2(646.38,1515) 737.53,1423.86 v2(737.53,1410)
UFP_RX2_N: D2.5 J2.A10 U3.18 | length 436.7
  Component Side w6: J2.A10@480.9,1486.66 480.9,1469.88 477.06,1466.04 477.06,1437.06 450.53,1410.53 450.53,1397.43 454.37,1393.59 D2.5@454.37,1380.75 D2.5@454.37,1349.25 454.37,1336.41 450.53,1332.57 450.53,1236.44 529.37,1157.6 U3.18@529.37,1098.39
UFP_RX2_P: D2.4 J2.A11 U3.19 | length 435.1
  Component Side w6: J2.A11@461.22,1486.66 461.22,1469.88 465.06,1466.04 465.06,1442.03 438.53,1415.5 438.53,1397.43 434.69,1393.59 D2.4@434.69,1380.75 D2.4@434.69,1349.25 434.69,1336.41 438.53,1332.57 438.53,1231.47 513.62,1156.38 U3.19@513.62,1098.39
UFP_TX1_N: C27.1 D1.1 J2.A3 | length 231.4
  Component Side w6: J2.A3@638.38,1486.66 638.38,1469.88 642.23,1466.04 642.23,1440.8 664.47,1418.56 664.47,1397.43 660.63,1393.59 D1.1@660.63,1380.75 D1.1@660.63,1349.25 660.63,1336.41 664.47,1332.57 664.47,1296.8 C27.1@645,1277.32
UFP_TX1_P: C25.1 D1.2 J2.A2 | length 231
  Component Side w6: J2.A2@658.07,1486.66 658.07,1469.88 654.23,1466.04 654.23,1445.77 676.47,1423.53 676.47,1397.43 680.32,1393.59 D1.2@680.32,1380.75 D1.2@680.32,1349.25 680.32,1336.41 676.47,1332.57 676.47,1295.85 C25.1@695,1277.32
UFP_TX1b_N: C27.2 U3.17 | length 233.6
  Component Side w6: U3.17@545.12,1098.39 545.12,1112.21 546.99,1114.09 546.99,1134.97 574.02,1162 629.02,1162 664,1196.98 664,1223.68 C27.2@645,1242.68
UFP_TX1b_P: C25.2 U3.16 | length 233.6
  Component Side w6: U3.16@560.87,1098.39 560.87,1112.21 558.99,1114.09 558.99,1130 578.99,1150 633.99,1150 676,1192.01 676,1223.68 C25.2@695,1242.68
UFP_TX2_N: C70.1 D2.2 J2.B3 | length 310.8
  Component Side w6: v2(393.47,1410) 393.47,1395.43 395.31,1393.59 D2.2@395.31,1380.75 D2.2@395.31,1349.25 395.31,1336.41 391.47,1332.57 391.47,1295.85 C70.1@410,1277.32 ; v2(488.9,1515) 488.9,1519.22 490.75,1521.06 J2.B3@490.75,1537.84
  Solder Side w6: v2(393.47,1410) 393.47,1417.18 488.9,1512.62 v2(488.9,1515)
UFP_TX2_P: C69.1 D2.1 J2.B2 | length 311.2
  Component Side w6: C69.1@360,1277.32 379.47,1296.8 379.47,1332.57 375.63,1336.41 D2.1@375.63,1349.25 D2.1@375.63,1380.75 375.63,1393.59 377.47,1395.43 v2(377.47,1410) ; J2.B2@471.06,1537.84 471.06,1521.06 472.9,1519.22 v2(472.9,1515)
  Solder Side w6: v2(377.47,1410) 377.47,1419.57 v2(472.9,1515)
UFP_TX2b_N: C70.2 U3.20 | length 221.8
  Component Side w6: C70.2@410,1242.68 390,1222.68 390,1190 393,1187 434.97,1187 497.87,1124.1 U3.20@497.87,1098.39
UFP_TX2b_P: C69.2 U3.21 | length 219.5
  Component Side w6: C69.2@360,1242.68 378,1224.68 378,1185.03 379,1184.03 388.03,1175 430,1175 482.13,1122.87 U3.21@482.13,1098.39
VBUS: C20.1 C21.1 C36_LS2.1 C36_LS3.1 C36_LS4.1 C59.1 C63.1 J6.1 J10.1 R5.2 R12.2 R27.1 R29.1 R31.1 R34.1 R35.1 U3.30 U5_LS2.7 U5_LS3.7 U5_LS4.7 U6.16 U7.16 | length 4321.7
  Component Side w6: R27.1@104.8,423.19 104.8,460.63 154.96,510.79 v1(244.76,510.79) ; R34.1@177.44,660 150,660 135,675 135,800 ; R35.1@177.44,800 135,800 ; U3.30@398.46,1014.72 249.21,1014.72 C21.1@246.5,1017.44 246.5,978.94 235,967.44 185,967.44 177.44,959.88 R12.2@177.44,927.44 142.44,927.44 135,920 135,800 ; v1(872.4,407.6) 782.6,407.6 732.44,357.44 R29.1@732.44,320 675,320 640,285 640,80 680,40 1695,40 1725,70 R31.1@1725,102.44 ; v1(3610,280) R5.2@3647.44,280
  Component Side w10: J6.1@80,1275 110,1305 v1(215,1305) ; C20.1@245.51,1107.44 246.5,1106.46 C21.1@246.5,1017.44 ; U6.16@325.16,408.58 325.16,450.39 ; U7.16@952.79,305.39 952.79,347.21
  Component Side w12: v1(215,1305) 245.51,1274.49 C20.1@245.51,1107.44 ; v1(244.76,510.79) 304.13,510.79 304.13,471.42 325.16,450.39 ; v1(872.4,407.6) C63.1@931.77,407.6 931.77,368.23 952.79,347.21
  Component Side w20: v1(215,1305) J10.1@215,1384.25 ; v1(2475,1065) C36_LS4.1@2475,1111.38 2476.38,1110 2505,1110 2523.2,1128.2 U5_LS4.7@2559.96,1128.2 ; U5_LS3.7@3310,1110.59 3354.41,1110.59 3366.38,1098.62 C36_LS3.1@3366.38,1011 3366.38,963.62 3395,935 3445,935 3465,955 v1(3650,955) 3677.76,955 3686.38,963.62 C36_LS2.1@3686.38,1011 3686.38,1098.62 3672.8,1112.2 U5_LS2.7@3627.4,1112.2
VBUS2: C67_AF2.1 C72.1 D6_AF2.1 J3.1 U5_LS2.6 U5_LS2.8 | length 1718.1
  Component Side w12: D6_AF2.1@3397.13,1805 3397.13,1753.94 C67_AF2.1@3406.06,1745
  Component Side w20: C67_AF2.1@3406.06,1745 3445,1745 3455,1735 v1(3455,1690) C72.1@3455,1606.61 3513.39,1606.61 3565,1555 3565,1140 ; U5_LS2.8@3627.4,1086.61 3583.39,1086.61 3565,1105 3565,1140 ; U5_LS2.6@3627.4,1137.8 3567.2,1137.8 3565,1140
  Solder Side w20: v1(3455,1690) 3455,1715 3400,1770 3400,1930 3435,1965 3765.16,1965 J3.1@3847.05,1883.11
VBUS3: C67_AF3.1 C73.1 D6_AF3.1 J4.1 U5_LS3.6 U5_LS3.8 | length 1342.6
  Component Side w12: C67_AF3.1@3225,1743.31 C67_AF3.1@3226.69,1745 3235.63,1753.94 D6_AF3.1@3235.63,1805
  Component Side w20: C67_AF3.1@3225,1743.31 v1(3225,1690) C73.1@3225,1606.61 3278.39,1606.61 3300,1585 3300,1345 3245,1290 3245,1135 ; U5_LS3.8@3310,1085 3265,1085 3245,1105 3245,1135 ; U5_LS3.6@3310,1136.18 3246.18,1136.18 3245,1135
  Solder Side w20: J4.1@3059.64,1883.11 3111.53,1935 3195,1935 3225,1905 v1(3225,1690)
VBUS4: C67_AF4.1 C74.1 D6_AF4.1 J5.1 U5_LS4.6 U5_LS4.8 | length 938.8
  Component Side w12: C67_AF4.1@2466.38,1540 2466.38,1571.38 2475.32,1580.31 D6_AF4.1@2475.32,1600
  Component Side w20: C67_AF4.1@2466.38,1540 v1(2466.38,1483.62) 2485,1465 2505,1445 2533.39,1416.61 C74.1@2533.39,1365 2533.39,1311.61 2630,1215 2630,1155 ; U5_LS4.8@2559.96,1102.61 2617.61,1102.61 2630,1115 2630,1155 ; U5_LS4.6@2559.96,1153.8 2628.8,1153.8 2630,1155
  Solder Side w20: J5.1@2272.83,1379.56 2376.89,1483.62 v1(2466.38,1483.62)
"VBUS IN": C68.1 D7.1 J2.A4 J2.A9 J2.B4 J2.B9 J10.2 | length 788.2
  Component Side w6: J2.A9@500.59,1486.66 500.59,1505.59 v2(510,1515) 510,1537.41 J2.B4@510.43,1537.84 ; J2.B9@608.86,1537.84 v2(608.86,1513.86) 618.7,1504.01 J2.A4@618.7,1486.66
  Component Side w12: D7.1@215,1515.32 271.06,1515.32 C68.1@280,1506.38 v2(280,1455)
  Component Side w20: J10.2@215,1415.75 215,1445 225,1455 v2(280,1455)
  Solder Side w20: v2(280,1455) 350,1385 410,1385 510,1485 v2(510,1515) 510,1530 520,1540 582.71,1540 v2(608.86,1513.86)
VDD12: C4.1 C5.1 C6.1 C7.1 C8.1 C9.1 C10.1 C11.1 C38.1 C39.1 C40.1 C41.1 C64.1 C65.1 C66.1 J8.1 R23.2 U1.5 U1.12 U1.15 U1.21 U1.28 U1.33 U1.43 U1.49 U2.21 U2.25 U2.30 U2.42 U2.44 U7.7 U7.8 U7.9 | length 4222.7
  Component Side w6: R23.2@732.44,190 685,190 665,170 665,105 690,80 1130,80 1145.24,95.24 C66.1@1145.24,147.4 ; C38.1@1160,721.38 C38.1@1161.38,720 ; v1(2650.59,603.35) C7.1@2650.59,646.97 ; C4.1@2650.59,841.97 v1(2650.59,885.59) ; v1(2683.35,455.59) C6.1@2726.97,455.59 ; v1(2908.35,998.35) C5.1@2951.97,998.35 ; U1.49@2939.09,569.09 2939.09,509.09 2931.97,501.97 C8.1@2931.97,455.59 v1(2975.59,455.59) ; C11.1@3156.97,998.35 v1(3200.59,998.35) ; v1(3223.35,598.35) C9.1@3223.35,641.97 ; C10.1@3223.35,791.97 v1(3223.35,835.59)
  Component Side w8: J8.1@860,635 945,635 990,590 v1(1160,590) ; C7.1@2650.59,646.97 2686.97,646.97 2700,660 2700,720 2721.34,741.34 U1.33@2814.09,741.34 ; C4.1@2650.59,841.97 2657.72,834.84 U1.28@2844.61,834.84 ; C6.1@2726.97,455.59 2726.97,491.97 2750,515 2815,515 2844.61,544.61 U1.43@2844.61,569.09 ; C5.1@2951.97,998.35 2954.84,995.47 U1.21@2954.84,834.84 ; U1.15@3049.33,834.84 3049.33,859.33 3156.97,966.97 C11.1@3156.97,998.35 ; U1.5@3079.84,662.6 3172.4,662.6 3193.03,641.97 C9.1@3223.35,641.97 ; U1.12@3079.84,772.83 3167.83,772.83 3190,795 3220.32,795 C10.1@3223.35,791.97
  Component Side w10: 1033.5,134.13 1064.13,134.13 ; 1033.5,167.6 1052.6,167.6 ; 1033.5,201.06 1058.94,201.06 ; C39.1@1158.62,545 1230,545 1311.73,626.73 U2.25@1311.73,687.13 ; C39.1@1160,546.38 v1(1160,590) ; C38.1@1160,721.38 v1(1160,765) ; C38.1@1161.38,720 1220,720 1235,735 1235,755 1250.79,770.79 U2.21@1287.13,770.79 ; U2.30@1410.16,687.13 1410.16,594.84 1478.5,526.5 C41.1@1478.5,470 ; v1(1478.5,406.5) C41.1@1478.5,455 ; U2.42@1552.87,810.16 1610.16,810.16 1660,860 ; U2.44@1552.87,849.53 1619.53,849.53 1630,860 1660,860 ; v1(1846.38,958.62) C40.1@1846.38,910 1846.38,881.38 1825,860 1660,860
  Component Side w12: C64.1@1145.24,317.4 v1(1145.24,376.57)
VDD12_DISABLE: U2.14 U2.15 | length 95.3
  Component Side w6: U2.15@1287.13,888.9 1251.1,888.9 1245,895 1245,900 1253.58,908.58 U2.14@1287.13,908.58
VDD25: C42.1 C43.1 C44.1 C45.1 C47.1 C48.1 U2.3 U2.6 U2.9 U2.12 U2.45 | length 1142.2
  Component Side w10: U2.12@1311.73,952.87 1311.73,988.27 1280,1020 C42.1@1280,1061.38 C43.1@1355,1061.38 ; U2.9@1370.79,952.87 1370.79,1019.21 1355,1035 C43.1@1355,1061.38 ; U2.6@1429.84,952.87 1429.84,1061.22 C44.1@1430,1061.38 ; U2.3@1488.9,952.87 1488.9,998.9 1505,1015 C45.1@1505,1061.38 ; U2.45@1552.87,869.21 1609.21,869.21 1650,910 C48.1@1688.5,910 1696.38,917.87 C47.1@1696.38,990 v1(1650,990) ; v2(1565,1060) 1506.38,1060 C45.1@1505,1061.38 ; C43.1@1355,1061.38 C44.1@1430,1061.38 ; C44.1@1430,1061.38 C45.1@1505,1061.38
  Solder Side w10: v2(1565,1060) 1580,1060 v1(1650,990)
VDD33: C14.1 C15.1 C16.1 C17.1 C22.1 C23.1 C46.1 C49.1 C50.1 C51.1 C52.1 C53.1 C54.1 C60.1 C61.1 C62.1 J7.1 P1.1 R1.1 R2.1 R3.1 R8.2 R11.2 R14.2 R18.2 R21.2 U1.16 U1.31 U1.44 U1.55 U2.20 U2.36 U2.38 U2.39 U2.46 U3.8 U4.8 U6.7 U6.8 U6.9 | length 4939.4
  Component Side w6: R21.2@104.8,293.19 57.36,293.19 37.36,273.19 37.36,208.19 62.36,183.19 502.36,183.19 517.6,198.43 C62.1@517.6,250.59 ; C23.1@500.51,792.44 500.51,834.21 529.37,863.07 U3.8@529.37,994.06 ; C49.1@1160,811.38 C49.1@1161.38,810 ; v1(1710,435) 1865,435 1960,530 R14.2@2002.44,530 ; v1(2650.59,693.35) C16.1@2650.59,736.97 ; v1(2773.35,455.59) C15.1@2816.97,455.59 ; C17.1@3066.97,455.59 3214.41,455.59 v1(3300,370) ; C14.1@3066.97,998.35 v1(3110.59,998.35) ; v1(3475,375) 3475,235 3540,170 3790,170 3857.56,237.56 R8.2@3857.56,480
  Component Side w8: C16.1@2650.59,736.97 2652.56,735 2685,735 2722.83,772.83 U1.31@2814.09,772.83 ; C15.1@2816.97,455.59 2816.97,486.97 2860.35,530.35 U1.44@2860.35,569.09 ; U1.55@3033.58,569.09 3033.58,536.42 3066.97,503.03 C17.1@3066.97,455.59 ; U1.16@3033.58,834.84 3033.58,893.58 3066.97,926.97 C14.1@3066.97,998.35
  Component Side w10: 405.87,237.32 436.5,237.32 ; 405.87,270.79 424.96,270.79 ; 405.87,304.25 431.3,304.25 ; v2(501.5,635.94) C22.1@501.5,702.44 500.51,703.43 C23.1@500.51,792.44 532.44,792.44 550,810 550,825 565,840 J7.1@640,840 ; v1(1050,635) R18.2@1097.44,635 ; C49.1@1160,811.38 v1(1160,855) ; C49.1@1161.38,810 1195.47,810 1215,790.47 U2.20@1287.13,790.47 ; U2.36@1528.27,687.13 1528.27,661.73 1615,575 C52.1@1641.38,575 ; U2.38@1552.87,731.42 1578.58,731.42 1595,715 1595,665 1615,645 C51.1@1641.38,645 ; U2.39@1552.87,751.1 1605.28,751.1 C50.1@1641.38,715 C51.1@1641.38,645 ; U2.46@1552.87,888.9 1598.9,888.9 1625,915 1625,1035 1650,1060 C46.1@1696.38,1060 ; v1(1710,435) 1688.5,456.5 C53.1@1688.5,495 1655,495 1641.38,508.62 C52.1@1641.38,575 ; C52.1@1641.38,575 C51.1@1641.38,645
  Component Side w12: C60.1@517.6,420.59 v1(517.6,479.76) ; v1(863.5,766.5) C54.1@863.5,820 863.7,820.2 U4.8@863.7,905
pads on no net: D4_AF2.4 D4_AF2.5 D4_AF3.4 D4_AF3.5 D4_AF4.4 D4_AF4.5 J1.11 J1.16 J1.17 J2.A8 J2.B8 U2.13 U2.22 U2.43 U3.3 U3.22 U3.23 U3.24 U3.27 U4.7 U5_LS2.4 U5_LS3.4 U5_LS4.4 U6.4 U6.5 U6.6 U6.10 U6.11 U6.15 U7.4 U7.5 U7.6 U7.10 U7.11 U7.15

## Polygon pours and split planes (outlines as drawn)
VDD33 on Component Side "Component Side-VDD12" (solid, pour order 4): 417.36,313.19 417.36,232.4 433.15,232.4 442.36,223.19 527.36,223.19 527.36,448.19 452.36,448.19 452.36,348.19
VDD12 on Component Side "Component Side-VDD12" (solid, pour order 0): 1045,210 1045,129.21 1060.79,129.21 1070,120 1155,120 1155,345 1080,345 1080,245
VDD33 on Power Plane (split plane): 1737.91,2223.26 1741.41,2221.8 1744.57,2219.7 1747.25,2217.01 1749.36,2213.85 1750.82,2210.35 1751.56,2206.62 1751.56,2204.72 1751.56,1811.02 1751.61,1810.53 1751.58,1810.04 1751.77,1806.18 1751.99,1804.72 1752.13,1803.24 1753.64,1795.67 1754.78,1791.9 1757.74,1784.77 1758.6,1783.16 1759.59,1781.3 1763.88,1774.88 1764.86,1773.69 1766.38,1771.84 1771.84,1766.38 1773.81,1764.76 1774.88,1763.88 1781.3,1759.59 1783.16,1758.6 1784.77,1757.74 1791.9,1754.78 1795.67,1753.64 1803.24,1752.13 1804.72,1751.99 1806.18,1751.77 1810.04,1751.58 1810.53,1751.61 1811.02,1751.56 1817.44,1751.56 1817.44,1607.56 968.13,1607.56 864.77,1710.93 864.77,1765.4 865.96,1766.38 871.42,1771.84 873.03,1773.81 873.91,1774.88 878.2,1781.3 879.2,1783.16 880.06,1784.77 883.01,1791.9 884.16,1795.67 885.66,1803.24 885.81,1804.71 886.02,1806.18 886.21,1810.04 886.19,1810.53 886.24,1811.02 886.24,2204.72 886.24,2206.62 886.98,2210.35 888.43,2213.85 890.54,2217.01 893.23,2219.7 896.38,2221.8 899.89,2223.26 903.61,2224 979.51,2224 979.51,1835.23 979.51,1835.17 979.51,1835.11 979.53,1831.23 979.94,1827.31 981.5,1819.71 982.13,1817.69 982.67,1815.95 985.68,1808.81 987.56,1805.34 991.91,1798.92 993.58,1796.91 994.43,1795.89 999.95,1790.44 1002.29,1788.54 1003.01,1787.96 1009.48,1783.69 1010.79,1783 1012.97,1781.86 1020.15,1778.93 1023.93,1777.81 1031.54,1776.35 1035.47,1775.99 1039.21,1776.01 1039.22,1776.01 1576.13,1776.01 1576.14,1776.01 1579.89,1775.99 1583.81,1776.35 1591.42,1777.81 1595.2,1778.93 1602.38,1781.86 1604.56,1783 1605.87,1783.69 1612.35,1787.96 1613.06,1788.54 1615.41,1790.44 1620.92,1795.89 1621.77,1796.91 1623.44,1798.92 1627.79,1805.34 1629.08,1807.72 1629.67,1808.8 1629.67,1808.81 1632.68,1815.95 1633.31,1817.96 1633.85,1819.71 1635.41,1827.31 1635.82,1831.23 1635.84,1835.11 1635.84,1835.17 1635.84,1835.23 1635.84,2224 1734.18,2224
VDD12 on Power Plane (split plane): 3307.44,562.56 3055,562.56 3053.04,562.31 3051.22,561.55 3049.65,560.35 3048.45,558.78 3047.69,556.96 3047.44,555 3047.44,372.56 2912.56,372.56 2912.56,500 2912.31,501.96 2911.55,503.78 2910.35,505.35 2908.78,506.55 2906.96,507.31 2905,507.56 2730,507.56 2728.04,507.31 2726.22,506.55 2724.65,505.35 2723.45,503.78 2722.69,501.96 2722.44,500 2722.44,372.56 2572.56,372.56 2572.56,642.44 2690,642.44 2691.96,642.69 2693.78,643.45 2695.35,644.65 2696.55,646.22 2697.31,648.04 2697.56,650 2697.56,840 2697.31,841.96 2696.55,843.78 2695.35,845.35 2693.78,846.55 2691.96,847.31 2690,847.56 1875,847.56 1873.04,847.31 1871.22,846.55 1869.65,845.35 1868.45,843.78 1867.69,841.96 1867.44,840 1867.44,710 1867.44,668.13 1529.65,330.35 1476.87,277.56 1107.56,277.56 1107.56,807.44 1202.44,807.44 1202.44,335 1202.69,333.04 1203.45,331.22 1204.65,329.65 1206.22,328.45 1208.04,327.69 1210,327.44 1330,327.44 1331.96,327.69 1333.03,328.14 1333.78,328.45 1335.35,329.65 1503.13,497.44 1540,497.44 1541.96,497.69 1543.03,498.14 1543.78,498.45 1545.35,499.65 1790.35,744.65 1791.55,746.22 1792.31,748.04 1792.56,750 1792.56,976.87 1830.35,1014.65 1833.13,1017.44 2425,1017.44 2688.75,1017.44 2690.71,1017.69 2691.78,1018.14 2692.53,1018.45 2694.1,1019.65 2746.88,1072.44 2941.87,1072.44 3059.65,954.65 3061.22,953.45 3063.04,952.69 3065,952.44 3155,952.44 3156.96,952.69 3158.78,953.45 3160.35,954.65 3161.55,956.22 3162.31,958.04 3162.56,960 3162.56,1025 3162.56,1077.44 3307.44,1077.44
VBUS on Power Plane (split plane): 1249.65,1279.65 1251.22,1278.45 1253.04,1277.69 1255,1277.44 1616.87,1277.44 1634.65,1259.65 1636.22,1258.45 1638.04,1257.69 1640,1257.44 3697.44,1257.44 3697.44,263.13 3656.87,222.56 3573.13,222.56 3557.56,238.13 3557.56,331.87 3595.35,369.65 3596.55,371.22 3597.31,373.04 3597.56,375 3597.56,1175 3597.31,1176.96 3596.55,1178.78 3595.35,1180.35 3593.78,1181.55 3591.96,1182.31 3590,1182.56 3040,1182.56 3038.04,1182.31 3036.22,1181.55 3034.65,1180.35 2941.87,1087.56 2743.75,1087.56 2741.79,1087.31 2739.97,1086.55 2738.4,1085.35 2685.62,1032.56 2428.13,1032.56 2315.35,1145.35 2313.78,1146.55 2313.03,1146.86 2311.96,1147.31 2310,1147.56 688.13,1147.56 645.35,1190.35 643.78,1191.55 643.03,1191.86 641.96,1192.31 640,1192.56 295,1192.56 293.04,1192.31 291.22,1191.55 289.65,1190.35 288.45,1188.78 287.69,1186.96 287.44,1185 287.44,870 287.69,868.04 288.14,866.97 288.45,866.22 289.65,864.65 347.44,806.87 347.44,450 347.69,448.04 348.45,446.22 349.65,444.65 351.22,443.45 353.04,442.69 355,442.44 765,442.44 766.96,442.69 768.03,443.14 768.78,443.45 770.35,444.65 798.13,472.44 952.44,472.44 952.44,352.56 793.13,352.56 770.35,375.35 768.78,376.55 768.03,376.86 766.96,377.31 765,377.56 203.13,377.56 147.56,433.13 147.56,526.87 220.35,599.65 221.55,601.22 222.31,603.04 222.34,603.27 222.56,605 222.56,1195 222.31,1196.96 221.55,1198.78 220.35,1200.35 182.56,1238.13 182.56,1336.87 218.13,1372.44 1156.87,1372.44
VDD33 on Power Plane (split plane): 500 vertices, not listed, extent 20.1,20.1 4035.02,2224
GND on Ground Plane (split plane): 1737.91,2223.26 1741.41,2221.8 1744.57,2219.7 1747.25,2217.01 1749.36,2213.85 1750.82,2210.35 1751.56,2206.62 1751.56,2204.72 1751.56,1811.02 1751.61,1810.53 1751.58,1810.04 1751.77,1806.18 1751.99,1804.72 1752.13,1803.24 1753.64,1795.67 1754.78,1791.9 1757.74,1784.77 1758.6,1783.16 1759.59,1781.3 1763.88,1774.88 1764.86,1773.69 1766.38,1771.84 1771.84,1766.38 1773.81,1764.76 1774.88,1763.88 1781.3,1759.59 1783.16,1758.6 1784.77,1757.74 1791.9,1754.78 1795.67,1753.64 1803.24,1752.13 1804.72,1751.99 1806.18,1751.77 1810.04,1751.58 1810.53,1751.61 1811.02,1751.56 1817.44,1751.56 1817.44,1607.56 968.13,1607.56 864.77,1710.93 864.77,1765.4 865.96,1766.38 871.42,1771.84 873.03,1773.81 873.91,1774.88 878.2,1781.3 879.2,1783.16 880.06,1784.77 883.01,1791.9 884.16,1795.67 885.66,1803.24 885.81,1804.71 886.02,1806.18 886.21,1810.04 886.19,1810.53 886.24,1811.02 886.24,2204.72 886.24,2206.62 886.98,2210.35 888.43,2213.85 890.54,2217.01 893.23,2219.7 896.38,2221.8 899.89,2223.26 903.61,2224 979.51,2224 979.51,1835.23 979.51,1835.17 979.51,1835.11 979.53,1831.23 979.94,1827.31 981.5,1819.71 982.13,1817.69 982.67,1815.95 985.68,1808.81 987.56,1805.34 991.91,1798.92 993.58,1796.91 994.43,1795.89 999.95,1790.44 1002.29,1788.54 1003.01,1787.96 1009.48,1783.69 1010.79,1783 1012.97,1781.86 1020.15,1778.93 1023.93,1777.81 1031.54,1776.35 1035.47,1775.99 1039.21,1776.01 1039.22,1776.01 1576.13,1776.01 1576.14,1776.01 1579.89,1775.99 1583.81,1776.35 1591.42,1777.81 1595.2,1778.93 1602.38,1781.86 1604.56,1783 1605.87,1783.69 1612.35,1787.96 1613.06,1788.54 1615.41,1790.44 1620.92,1795.89 1621.77,1796.91 1623.44,1798.92 1627.79,1805.34 1629.08,1807.72 1629.67,1808.8 1629.67,1808.81 1632.68,1815.95 1633.31,1817.96 1633.85,1819.71 1635.41,1827.31 1635.82,1831.23 1635.84,1835.11 1635.84,1835.17 1635.84,1835.23 1635.84,2224 1734.18,2224
GND on Ground Plane (split plane): 235 vertices, not listed, extent 20.1,20.1 4035.02,2224

## Other copper
Ground Plane (plane layer: these items are gaps in the copper):
  lines w15: 857.21,1786.05 857.21,1707.8 965,1600 1825,1600 1825,1756.65 1840,1771.65 ; 1275,0 1285,0
Power Plane (plane layer: these items are gaps in the copper):
  lines w15: 857.21,1786.05 857.21,1707.8 965,1600 1825,1600 1825,1756.65 ; 960,0 960,345 ; 960,345 960,480 795,480 765,450 355,450 355,810 295,870 295,1185 640,1185 685,1140 2310,1140 2425,1025 2688.75,1025 ; 960,345 790,345 765,370 200,370 140,430 140,530 215,605 215,1195 175,1235 175,1340 215,1380 1160,1380 1255,1285 1620,1285 1640,1265 3705,1265 3705,260 3660,215 3570,215 3550,235 3550,335 3590,375 3590,1175 3040,1175 2945,1080 ; 2688.75,1025 2743.75,1080 ; 2688.75,1025 2743.75,1080 ; 2688.75,1025 2116.25,1025 1830,1025 1825,1020 1785,980 1785,750 1540,505 1500,505 1330,335 1210,335 1210,815 1100,815 1100,270 1480,270 1535,325 1875,665 1875,710 1875,840 2690,840 2690,650 2565,650 2565,365 2730,365 2730,500 2905,500 2905,365 3055,365 3055,555 3315,555 3315,1085 3155,1085 3155,1025 3155,960 3065,960 2945,1080 ; 2743.75,1080 2945,1080 ; 2743.75,1080 2945,1080

## Silkscreen, mask and mechanical layers (free items; w line width, h text height)
Top Overlay:
  text "VBUS" at 105,1350 h32 r90
  text "3.3V" at 580,885 h32
  text "O2" at 275,710 h32
  text "1.2V" at 805,680 h32
  text "GND" at 3730,620 h32
  text "O1" at 275,570 h32
  text "1.2V" at 1525,205 h32 r90
  text "3.3V" at 1675,205 h32 r90
  text "VBUS" at 1820,200 h32 r90
Bottom Overlay:
  text "Framework/Thinkpad 701C - USB Hub + GbE / Karl Buchka, 2024" at 3995,50 h32
Mechanical 2:
  circle w3.94: c2668.43,1682.17 r90
  circle w3.94: c148.74,1682.17 r90
  circle w3.94: c645,690 r53.15
  circle w3.94: c646.1,691.06 r90
  circle w10: c2667.32,1681.1 r80
  circle w3.94: c147.64,1681.1 r53.15
  circle w0.5: c2667.32,1681.1 r53.15
  circle w0.5: c3709.25,1880.96 r19.68
  circle w0.5: c1307.68,1709.49 r19.68
  circle w0.5: c2921.85,1932.33 r19.68
  circle w0.5: c559.64,1537.84 r19.68
  circle w0.5: c2135.04,1428.78 r19.68
  lines w3.94: 0,0 0,1732.28 cw(c39.37,1732.28) 39.37,1771.65 240.16,1771.65 826.77,1771.65 ccw(c826.77,1811.02) 866.14,1811.02 866.14,2204.72 cw(c905.51,2204.72) 905.51,2244.09 1732.28,2244.09 cw(c1732.28,2204.72) 1771.65,2204.72 1771.65,1811.02 ccw(c1811.02,1811.02) 1811.02,1771.65 2480.32,1771.65 ccw(c2480.32,1811.02) 2519.69,1811.02 2519.69,2204.72 cw(c2559.06,2204.72) 2559.06,2244.09 4015.75,2244.09 cw(c4015.75,2204.72) 4055.12,2204.72 4055.12,0 ; 1.97,1.97 4057.09,1.97

## Text inside footprints (layer, text, board x,y; h text height)
J1: Mechanical 1 "Board edge" at 1099.01,2170.12 h40; Mechanical 1 "Connector Edge" at 1032.09,2351.22 h40
P1: Top Overlay "6" at 2130,95 h32; Top Overlay "5" at 2130,195 h32; Top Overlay "2" at 2490,100 h32; Top Overlay "1" at 2485,200 h32